# Altium PCB Motor_Driver_HIP4082_Board_V1.0.PcbDoc
Units mm, origin at the board's own origin, x right, y up, seen from the top; angles counter-clockwise.
Board outline 78 x 40 mm, 4 copper layers (TOP, GND02, POWER03, Bottom), stack 0.603 mm thick; 59 components, 43 nets, 179 pads, 191 vias.
Unrouted connection lines stored in the file: 1.
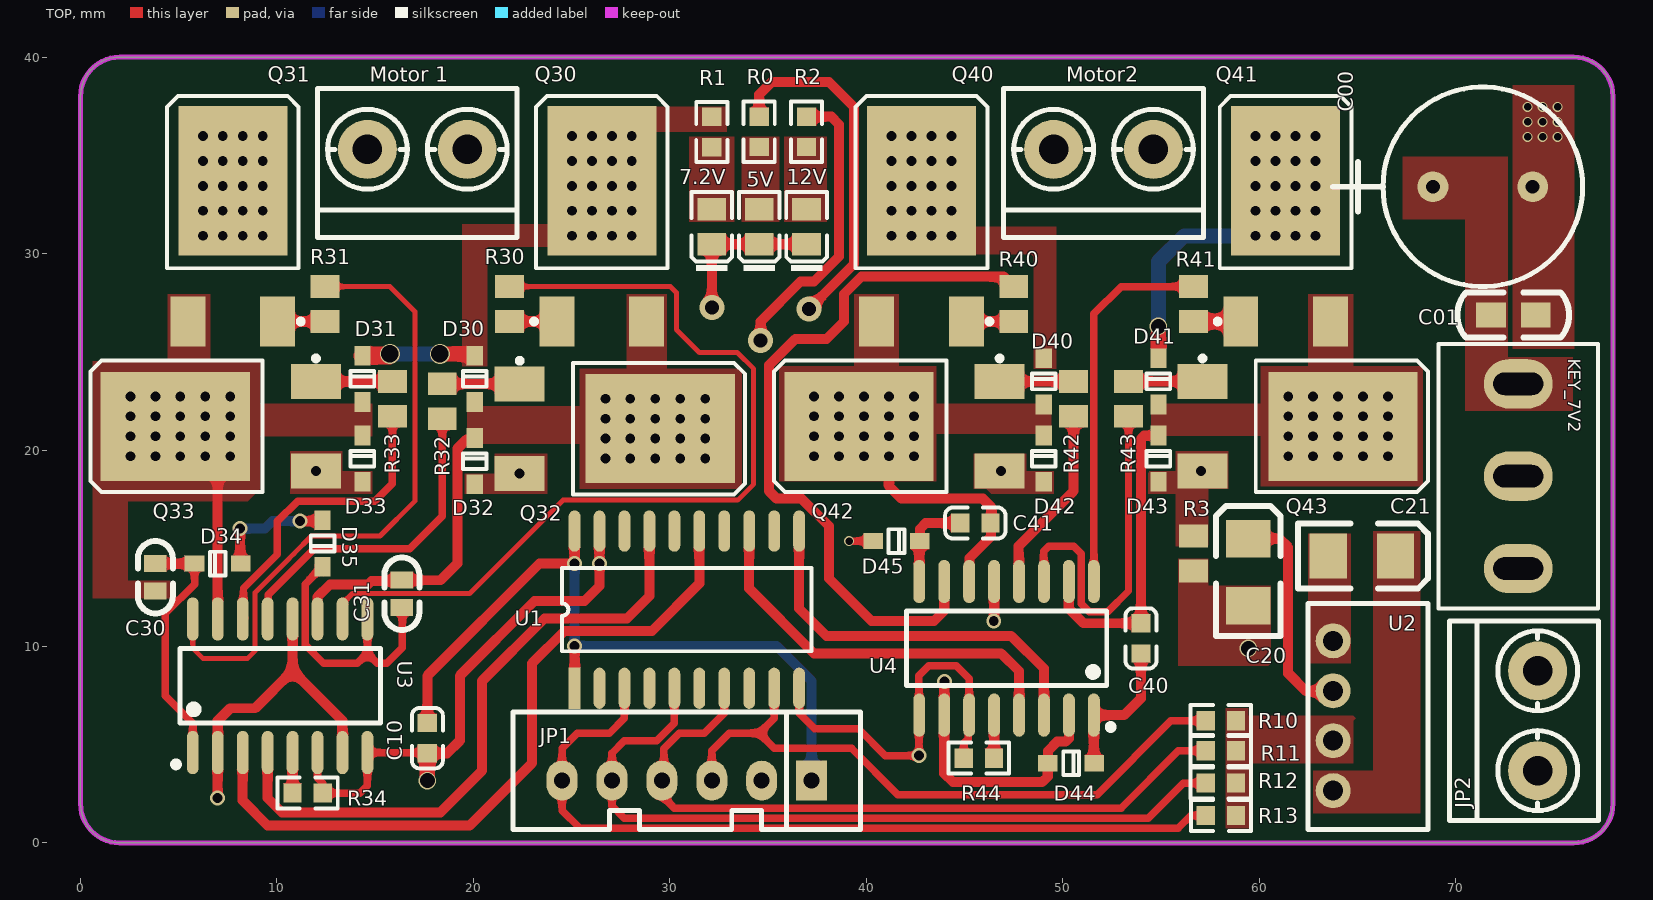
[diagram p0: TOP view]
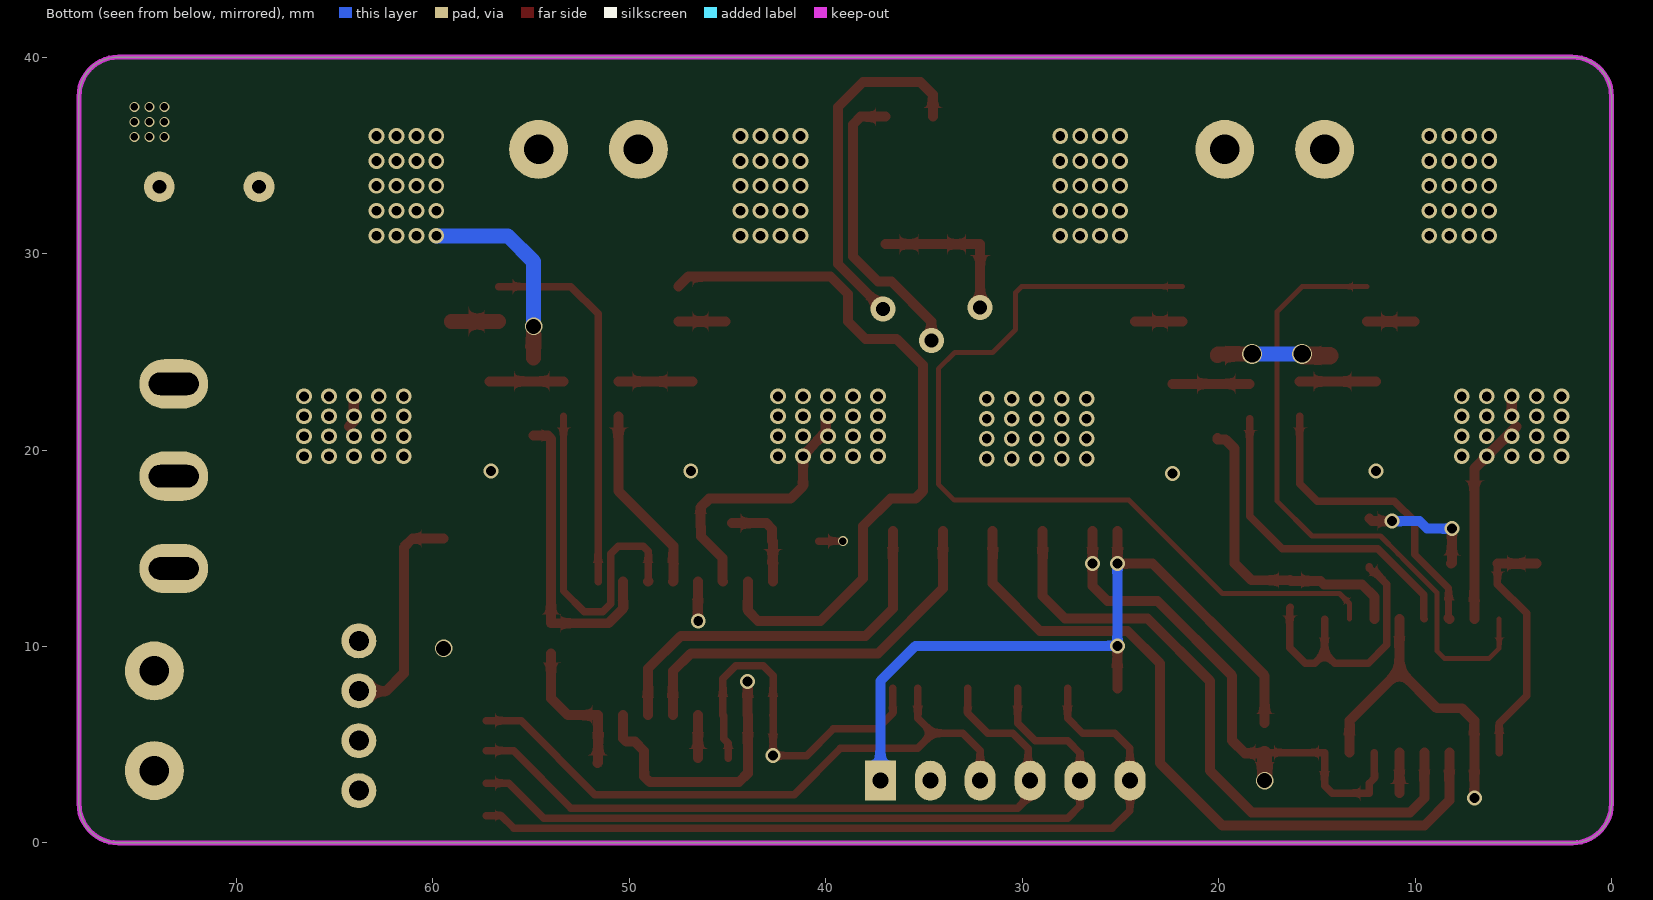
[diagram p1: Bottom view, seen from below]
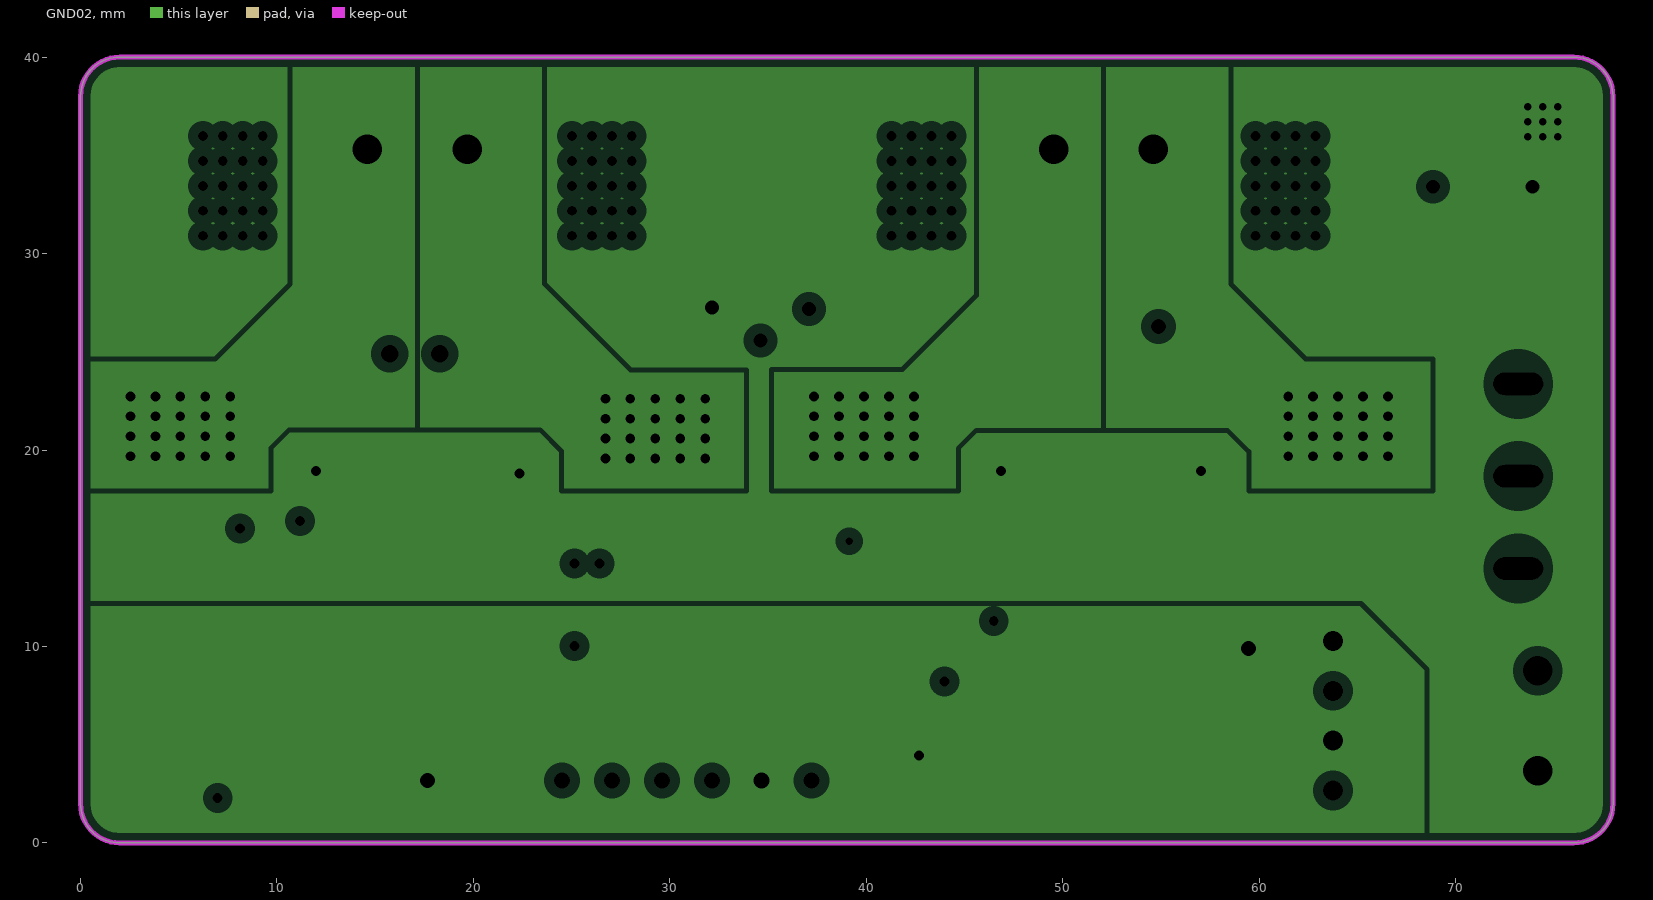
[diagram p2: GND02, clearances drawn from the general rule]
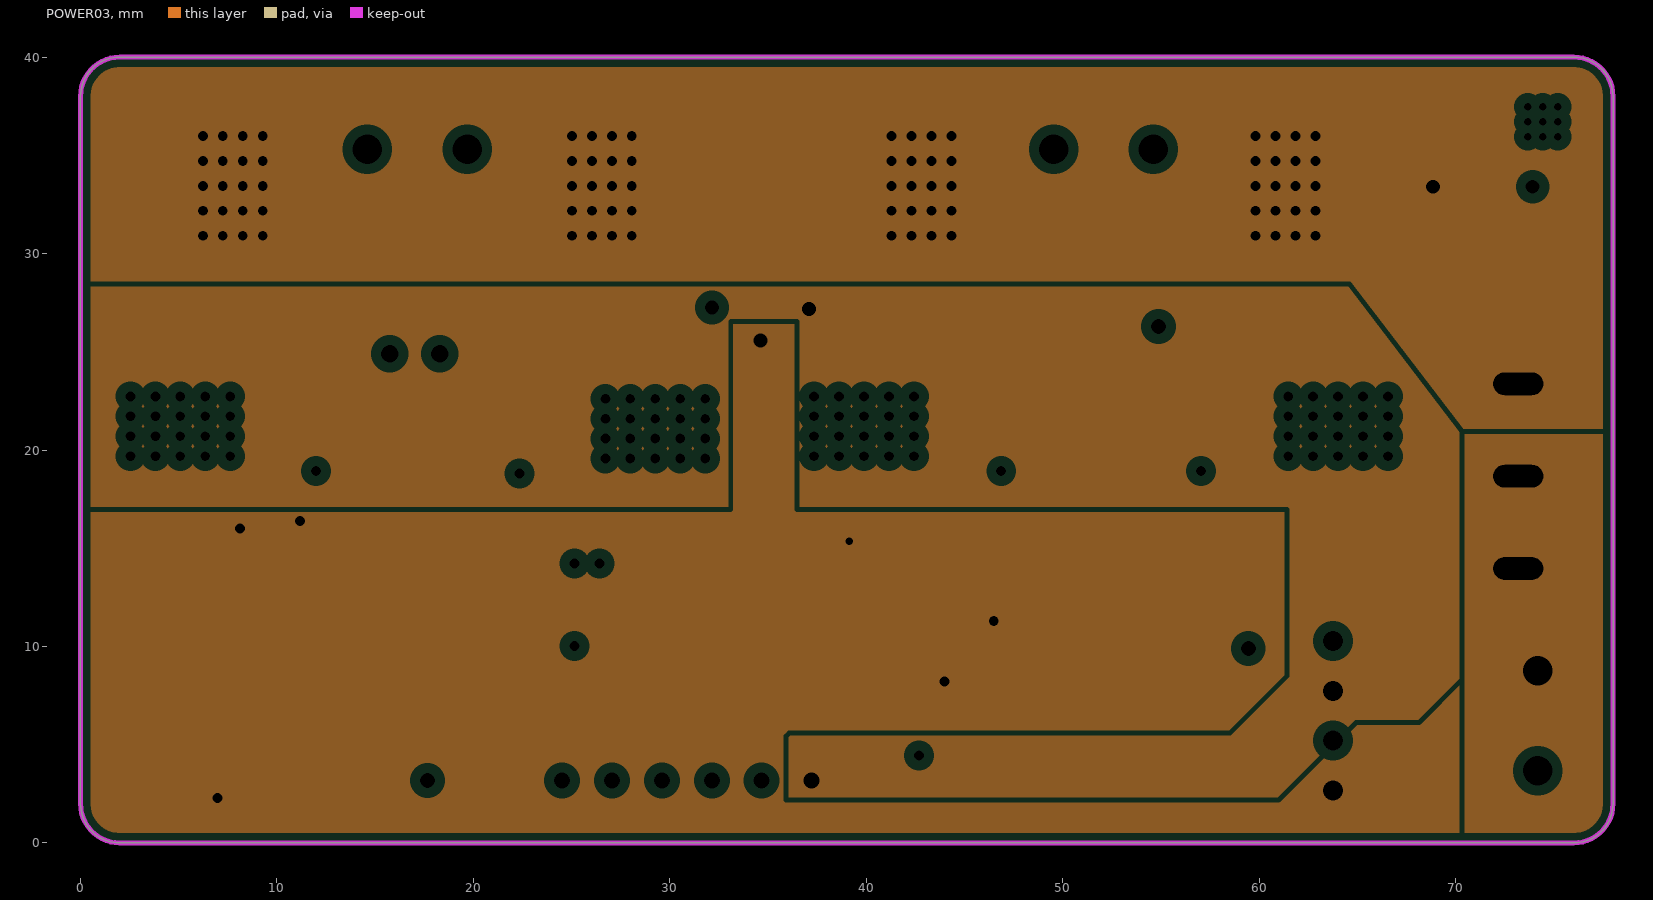
[diagram p3: POWER03, clearances drawn from the general rule]
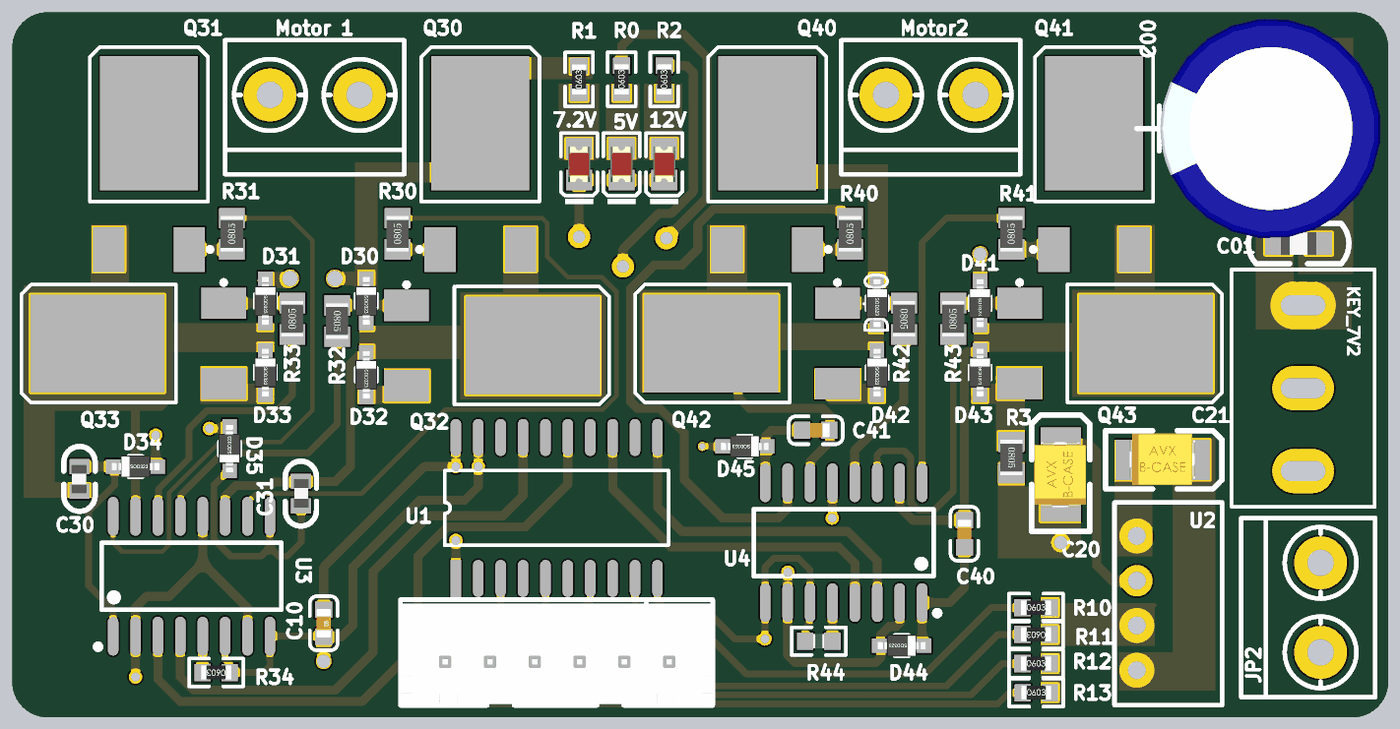
[diagram p4: 3D render of the assembled board from above, using the file's embedded part models]

## Layer stack, top to bottom
Top Solder: solder mask 0.0102, Solder Resist, Dk 3.5
TOP: signal copper 0.0356
Dielectric 2: prepreg 0.0711, PP-006, Dk 4.1
GND02: plane copper 0.035, net (Multiple Nets)
Dielectric 1: dielectric 0.32, FR-4, Dk 4.8
POWER03: plane copper 0.035, net (Multiple Nets)
Dielectric 3: prepreg 0.0711, PP-006, Dk 4.1
Bottom: signal copper 0.0356
Bottom Solder: solder mask 0.0102, Solder Resist, Dk 3.5

## Board outline
2,0 cw(c2,2) 0,2 0,38 cw(c2,38) 2,40 76,40 cw(c76,38) 78,38 78,2 cw(c76,2) 76,0

## Design rules (kind name [scope] priority, off if disabled: settings)
Clearance [All] p1: gap=0.051 ignorepadtopadclearanceinfootprint=FALSE
HoleSize [All] p1 off: absolutevalues=TRUE maxlimit=2.54 minlimit=0.025 maxpercent=80.000 minpercent=20.000
HoleToHoleClearance [All] p1 off: gap=0.254 allowstackedmicrovias=TRUE
MinimumSolderMaskSliver [All] p1 off: minsoldermaskwidth=0.254
PlaneClearance [All] p1: clearance=0.508
PlaneConnect [All] p1: planeconnectstyle=Direct reliefexpansion=0.508 reliefentries=4 reliefconductorwidth=0.254 reliefairgap=0.254
PolygonConnect [All] p1: connectstyle=Direct reliefconductorwidth=0.254 reliefentries=4 polygonreliefangle="90 Angle" airgapwidth=0.254
RoutingVias [All] p1: holewidth=0.711 width=1.27 viastyle="Through Hole" minholewidth=0.711 minwidth=1.27 maxholewidth=0.711 maxwidth=1.27
SilkToSilkClearance [All] p1 off: silktosilkclearance=0.254
SilkToSolderMaskClearance [IsPad] p1 off: minsilkscreentomaskgap=0.254 clearancetoexposedcopper=TRUE
SolderMaskExpansion [All] p1: expansion=0.102
Width PGND [InNet('PGND')] p1: maxlimit=1.27 minlimit=0.254 preferedwidth=0.762
Width GND [InNet('GND')] p2: maxlimit=1.27 minlimit=0.254 preferedwidth=0.762
Width 12V [InNet('12V')] p3: maxlimit=1.27 minlimit=0.254 preferedwidth=0.762
Width "7.2V In" [InNet('7.2V In')] p4: maxlimit=1.27 minlimit=0.254 preferedwidth=0.762
Width 7.2V [InNet('7.2V')] p5: maxlimit=1.27 minlimit=0.254 preferedwidth=0.762
Width 5V [InNet('5V')] p6: maxlimit=1.27 minlimit=0.254 preferedwidth=0.762
Width [All] p7: maxlimit=0.762 minlimit=0.254 preferedwidth=0.508
23 further rules are at their usual default settings.

## Classes and differential pairs
component class Motor_Driver_HIP4082_Board_V1.0: 5V 7.2V 12V C00 C01 C10 C20 C21 C30 C31 C40 C41 D30 D31 D32 D33 D34 D35 D40 D41 D42 D43 D44 D45 JP1 JP2 Motor2 "Motor 1" Q31 Q32 Q40 Q41 Q42 Q43 R0 R1 R2 R3 R10 R11 R12 R13 R30 R31 R32 R33 R34 R40 R41 R42 R43 R44 U1 U2 U3 U4

## Components (designator, comment, footprint, x,y, rotation, side; value= is the part's Value field where it differs from the comment)
5V "" 0805_LED_S1 34.544,31.369 r90 top
7.2V "" 0805_LED_S1 32.131,31.369 r90 top
12V "" 0805_LED_S1 36.957,31.369 r90 top
C00 "470uF/25V" RB.2/.4 68.834,33.401 r180 top
C01 "100nF" 0805C 74.066,26.873 r180 top
C10 "100nF" 0603_C 17.653,5.334 r270 top
C20 "" 3528 59.436,15.494 r90 top value=4.7uF
C21 "" 3528 66.929,14.605 r0 top value=2.2uF
C30 "1uF" 0603C 3.81,14.224 r270 top
C31 "1uF" 0603C 16.358,11.989 r90 top
C40 "1uF" 0603_C 53.975,10.414 r90 top
C41 "1uF" 0603_C 45.542,16.281 r0 top
D30 "1N5819" SOD-323 20.066,23.622 r270 top
D31 "1N5819" SOD-323 14.351,23.622 r270 top
D32 "1N5819" SOD-323 20.066,19.431 r270 top
D33 "1N5819" SOD-323 14.351,19.558 r270 top
D34 "1N5819" SOD-323 6.985,14.224 r0 top
D35 "1N5819" SOD-323 12.319,15.24 r90 top
D40 "1N5819" SOD-323 49.022,23.495 r270 top
D41 "1N5819" SOD-323 54.864,23.495 r270 top
D42 "1N5819" SOD-323 49.022,19.558 r270 top
D43 "1N5819" SOD-323 54.864,19.558 r270 top
D44 "1N5819" SOD-323 50.419,4.064 r180 top
D45 "1N5819" SOD-323 41.529,15.367 r180 top
JP1 "HEADER 6" SIP6N 37.211,3.175 r180 top
JP2 "HEADER 2" KF301-2P#1 74.168,6.223 r180 top
KEY_7V2 "SS-12F23" KEY_7V2 73.177,18.67 r270 top
Motor2 "HEADER 2" KF301-2P#1 52.07,35.306 r270 top
"Motor 1" "HEADER 2" KF301-2P#2 17.145,35.306 r270 top
Q30 "IR7843" LR7843#1 26.537,30.143 r270 top
Q31 "IR7843" LR7843#2 7.753,30.143 r270 top
Q32 "IR7843" LR7843#1 25.952,21.088 r180 top
Q33 "IR7843" LR7843#2 8.382,21.209 r0 top
Q40 "IR7843" LR7843#2 42.805,30.143 r270 top
Q41 "IR7843" LR7843#1 61.335,30.143 r270 top
Q42 "IR7843" LR7843#2 43.18,21.209 r0 top
Q43 "IR7843" LR7843#1 60.706,21.209 r180 top
R0 "4.7K" 0603_R 34.544,36.195 r90 top
R1 "4.7K" 0603_R 32.131,36.187 r90 top
R2 "4.7K" 0603_R 36.957,36.195 r90 top
R3 "0" 0805 56.642,14.731 r270 top
R10 "10K" 0603_R 58.039,6.223 r0 top
R11 "10K" 0603_R 58.039,4.699 r180 top
R12 "10K" 0603_R 58.039,3.048 r0 top
R13 "10K" 0603_R 58.047,1.397 r0 top
R30 "20" 0805 21.844,27.432 r90 top
R31 "20" 0805 12.446,27.432 r90 top
R32 "20" 0805 18.415,22.479 r270 top
R33 "20" 0805 15.875,22.606 r90 top
R34 "10K" 0603_R 11.557,2.54 r180 top
R40 "20" 0805 47.498,27.432 r90 top
R41 "20" 0805 56.642,27.432 r90 top
R42 "20" 0805 50.546,22.606 r270 top
R43 "20" 0805 53.34,22.606 r90 top
R44 "10K" 0603_R 45.72,4.318 r0 top
U1 "74HC245" SOP20 25.146,7.875 r90 top
U2 "B0512S-1W" SIP4_B_S-1W 62.484,0.686 r0 top
U3 "HIP4082" SOP-16_208mil#1 10.16,8.001 r0 top
U4 "HIP4082" SOP-16_208mil#2 47.133,9.906 r180 top

## Footprints (in the part's own frame and the unit in brackets; to place one, negate y for a bottom-side part, rotate by r counter-clockwise, add the part's x,y. Pads: shape width x height; smd on the part's side, far side on the other; paste and mask are expansions set on the pad)
0603_C [mm]
  rect 0.93x0.98 smd: 1(-0.77,0) 2(0.77,0)
  silkscreen extent -1.53,-0.79 1.54,0.79, body extent -0.8,-0.4 0.8,0.4, height 0.3
0603_R [mm]
  rect 0.93x0.98 smd: 1(-0.77,0) 2(0.77,0)
  silkscreen extent -1.53,-0.79 1.54,0.79, body extent -0.85,-0.4 0.85,0.4, height 0.56
0603C [mil]
  rect 34x45 smd: 1(0,0) 2(55,0)
  silkscreen extent -45,-35 100,35, body extent -3,-18 60,16, height 37
0805 [mm]
  rect 1.16x1.47 smd: 1(-0.89,0) 2(0.89,0)
  body extent -1,-0.63 1,0.63, height 0.55
0805_LED_S1 [mm]
  rect 1.16x1.47 smd: A(0.89,0) K(-0.89,0)
  silkscreen extent -2.24,-1.04 1.77,1.03, body extent -1.01,-0.62 1.01,0.62, height 1.1
0805C [mil]
  rect 60x50 smd: 1(0,0) 2(90,0)
  silkscreen extent -67,-45 157,45, body extent 6,-26 84,26, height 29
3528 [mil]
  rect 75x90 smd: 1(0,0) 2(-135,0)
  silkscreen extent -195,-65 65,65, body extent -141,-57 5,59, height 80
KEY_7V2 [mil]
  oval 99x138 hole 45 slot 100 at 90 deg: 1(-185.04,0) 2(0,0) 3(185.04,0)
  silkscreen extent -265,-160 265,160
KF301-2P#1 [mm]
  round 3 hole 1.5: 1(0,2.54) 2(0,-2.54)
  silkscreen extent -3.1,-5.08 4.5,5.08
KF301-2P#2 [mm]
  round 3 hole 1.5: 1(0,-2.54) 2(0,2.54)
  silkscreen extent -3.1,-5.08 4.5,5.08
LR7843#1 [mm]
  rect 7.6x5.55 smd: 1(-3.556,0)
  rect 2.54x1.778 smd: 2(3.6,-2.28) 3(3.6,2.28)
  silkscreen extent -7.87,-3.58 3.72,3.35
LR7843#2 [mm]
  rect 7.6x5.55 smd: 1(-3.556,0)
  rect 2.54x1.778 smd: 2(3.6,2.28) 3(3.6,-2.28)
  silkscreen extent -7.87,-3.35 3.72,3.58
RB.2/.4 [mil]
  round 62 hole 28: 1(0,0) 2(-200,0)
  silkscreen extent -300,-200 200,200, body extent -345,-246 147,246, height 986
SIP4_B_S-1W [mil]
  round 70 hole 40: 1(50,378) 2(50,278) 3(50,178) 4(50,78)
  silkscreen extent 0,0 240,453
SIP6N [mil]
  rect 62x80 hole 32: 1(0,0)
  oval 62x80 hole 32: 2(100,0) 3(200,0) 4(300,0) 5(400,0) 6(500,0)
  silkscreen extent -98,-138 598,98, body extent -99,-129 597,95, height 277
SOD-323 [mm]
  rect 1x0.83 smd: 1(1.18,0) 2(-1.18,0)
  silkscreen extent -0.4,-0.6 0.4,0.6, body extent -1.35,-0.62 1.35,0.63, height 1.1
SOP20 [mm]
  rect 2.1x0.6 smd: 1(0,0)
  oval 2.1x0.6 smd: 2(0,-1.27) 3(0,-2.54) 4(0,-3.81) 5(0,-5.08) 6(0,-6.35) 7(0,-7.62) 8(0,-8.89) 9(0,-10.16) 10(0,-11.43) 11(8,-11.43) 12(8,-10.16) 13(8,-8.89) 14(8,-7.62) 15(8,-6.35) 16(8,-5.08) 17(8,-3.81) 18(8,-2.54) 19(8,-1.27) 20(8,0)
  silkscreen extent 1.89,-12.06 6.11,0.64
SOP-16_208mil#1 [mm]
  oval 0.6x2.2 smd: 1(-4.445,-3.4) 2(-3.175,-3.4) 3(-1.905,-3.4) 4(-0.635,-3.4) 5(0.635,-3.4) 6(1.905,-3.4) 7(3.175,-3.4) 8(4.445,-3.4) 9(4.445,3.4) 10(3.175,3.4) 11(1.905,3.4) 12(0.635,3.4) 13(-0.635,3.4) 14(-1.905,3.4) 15(-3.175,3.4) 16(-4.445,3.4)
  silkscreen extent -5.45,-4.15 5.1,1.9
SOP-16_208mil#2 [mm]
  oval 0.6x2.2 smd: 1(-4.445,3.4) 2(-3.175,3.4) 3(-1.905,3.4) 4(-0.635,3.4) 5(0.635,3.4) 6(1.905,3.4) 7(3.175,3.4) 8(4.445,3.4) 9(4.445,-3.4) 10(3.175,-3.4) 11(1.905,-3.4) 12(0.635,-3.4) 13(-0.635,-3.4) 14(-1.905,-3.4) 15(-3.175,-3.4) 16(-4.445,-3.4)
  silkscreen extent -5.45,-1.9 5.1,4.15

## Part data
5V 7.2V 12V: library part LED
C00: library part CAPACITOR, "Capacitor"
C01 C10 C30 C31 C40 C41: library part CAP, "Capacitor"
C20 C21: library part "Cap Pol3", "Polarized Capacitor (Surface Mount)", LatestRevisionDate=29-May-2009, LatestRevisionNote="IPC-7351 Footprint Added.", PackageDescription="Chip Capacitor", PackageReference=C0805, Published=8-Jun-2000, Publisher="Altium Limited"
D30 D31 D32 D33 D34 D35 D40 D41 D42 D43 D44 D45: library part "DIODE SCHOTTKY", "Schottky Diode"
KEY_7V2: library part SSW-1P, "1路波动开关", 学习资源=ww
Q30 Q31 Q32 Q33 Q40 Q41 Q42 Q43: library part MOSFET-N, "N-Channel MOSFET", LatestRevisionDate=17-Jul-2002, LatestRevisionNote="Re-released for DXP Platform.", PackageDescription="TO, Flat Index; 3 In-Line, Axial Leads; Body Dia. 4.6mm; Lead Dia. 0.5 mm (max)", PackageReference=E3, PackageVersion=1995/1996, Published=8-Jun-2000, Publisher="Altium Limited"
R0 R1 R2 R3 R10 R11 R12 R13 R30 R31 R32 R33 R34 R40 R41 R42 R43 R44: library part RES2
U2: library part "4 HEADER", "4 Pin Header"

## Via types
v1: diameter 0.8, hole 0.5, TOP to Bottom, 160 vias
v2: diameter 0.762, hole 0.508, TOP to Bottom, 13 vias
v3: diameter 0.508, hole 0.381, TOP to Bottom, 10 vias
v4: diameter 1.27, hole 0.711, TOP to Bottom, 3 vias
v5: diameter 0.889, hole 0.762, TOP to Bottom, 3 vias
v6: diameter 1.016, hole 0.889, TOP to Bottom, 2 vias

## Nets (pads, with @x,y where several pads share a name; then routed paths per layer and width w, separated by ;. In a path a pad name is that pad's centre, name@x,y a point inside that pad or via, vN(x,y) a via of type N, cw(c..) or ccw(c..) an arc to the next point about the centre after c; other vN are vias at no path point)
5V: C10.1 C20.1 JP1.1 R0.2 U1.1 U1.20 U2.2 | length 67.4
  TOP w0.508: C10.1 17.653,8.509 23.368,14.224 v2(25.146,14.224) U1.20 ; U1.1 v2(25.146,10.033) ; R0.2 34.544,38.1 35.179,38.735 38.1,38.735 39.37,37.465 39.37,29.464 v4(37.084,27.178) ; C20.1 61.022,15.494 61.468,15.048 61.468,8.636 62.381,7.723 63.73,7.723 U2.2
  Bottom w0.508: v2(25.146,14.224) v2(25.146,10.033) 35.433,10.033 37.211,8.255 JP1.1
7.2V: C00.1 C01.2 D30.2 D31.2 D40.2 D41.2 KEY_7V2.1 Q30.1 Q31.1 Q40.1 Q41.1 R1.2 | length 16.2
  TOP w0.762: v6(18.288,24.892) 20.032,24.892 20.064,24.86 20.064,24.801 20.066,24.799 D30.2 ; D41.2 v5(54.864,26.289)
  TOP w0.889: D31.2 v6@15.711,24.802
  Bottom w0.762: v6(15.748,24.892) v6(18.288,24.892) ; v5(54.864,26.289) 54.864,29.591 56.178,30.905 v1(59.811,30.905)
  other v1: 6.229,30.905 7.245,30.905 8.261,30.905 9.277,30.905 25.013,30.905 26.029,30.905 27.045,30.905 28.061,30.905 41.281,30.905 42.297,30.905 43.313,30.905 44.329,30.905 60.827,30.905 61.843,30.905 62.859,30.905 6.229,32.175 7.245,32.175 8.261,32.175 9.277,32.175 25.013,32.175 26.029,32.175 27.045,32.175 28.061,32.175 41.281,32.175 42.297,32.175 43.313,32.175 44.329,32.175 59.811,32.175 60.827,32.175 61.843,32.175 62.859,32.175 6.229,33.445 7.245,33.445 8.261,33.445 9.277,33.445 25.013,33.445 26.029,33.445 27.045,33.445 28.061,33.445 41.281,33.445 42.297,33.445 43.313,33.445 44.329,33.445 59.811,33.445 60.827,33.445 61.843,33.445 62.859,33.445 6.229,34.715 7.245,34.715 8.261,34.715 9.277,34.715 25.013,34.715 26.029,34.715 27.045,34.715 28.061,34.715 41.281,34.715 42.297,34.715 43.313,34.715 44.329,34.715 59.811,34.715 60.827,34.715 61.843,34.715 62.859,34.715 6.229,35.985 7.245,35.985 8.261,35.985 9.277,35.985 25.013,35.985 26.029,35.985 27.045,35.985 28.061,35.985 41.281,35.985 42.297,35.985 43.313,35.985 44.329,35.985 59.811,35.985 60.827,35.985 61.843,35.985 62.859,35.985
"7.2V In": JP2.2 KEY_7V2.2 KEY_7V2.3
12V: C21.1 D34.1 D35.1 D44.1 D45.1 R2.2 U2.4 U3.2 U3.7 U3.12 U4.2 U4.7 U4.12 | length 55
  TOP w0.381: v3(39.116,15.367) D45.1
  TOP w0.508: v2(6.985,2.286) U3.2 6.985,6.223 7.62,6.858 8.89,6.858 10.795,8.763 ; v2(8.128,16.002) 8.128,14.261 D34.1 ; U3.12 10.795,8.763 ; v2(11.176,16.383) 12.192,16.383 D35.1@12.319,16.51 ; U3.7 13.335,6.223 10.795,8.763 ; v4(34.62,25.578) 34.62,26.543 36.652,28.575 37.338,28.575 38.608,29.845 38.608,36.576 38.219,36.965 R2.2 ; v2(43.967,8.23) 43.967,6.515 U4.7 43.958,3.547 44.406,3.099 48.946,3.099 49.239,3.392 D44.1 49.239,4.687 49.708,5.156 50.14,5.156 50.308,5.325 U4.2 ; v2(46.482,11.303) 46.498,11.319 U4.12
  Bottom w0.508: v2(8.128,16.002) 9.398,16.002 9.779,16.383 v2(11.176,16.383)
AHO1: R30.2 U3.10 | length 45.4
  TOP w0.254: U3.10 13.335,12.192 13.843,12.7 19.812,12.7 24.562,17.45 33.452,17.45 34.265,18.263 34.265,24.13 33.426,24.968 31.496,24.968 30.328,26.137 30.328,28.016 30.022,28.322 R30.2
AHO2: R40.2 U4.10 | length 36.7
  TOP w0.508: U4.10 43.958,11.827 43.434,11.303 40.259,11.303 38.1,13.462 38.1,16.129 36.703,17.526 35.433,17.526 35.052,17.907 35.052,24.325 36.381,25.654 37.973,25.654 38.862,26.543 38.862,27.94 39.751,28.829 46.991,28.829 R40.2
AHS1: "Motor 1.2" C31.2 D30.1 D32.2 Q30.3 Q32.1 U3.11 | length 16
  TOP w0.508: U3.11 12.065,12.529 12.693,13.157 14.63,13.157 14.808,13.335 16.307,13.335 C31.2 16.37,13.373 18.326,13.373 19.177,14.224 19.177,20.067 19.636,20.526 20.066,20.526 D32.2
  other v1: 26.714,19.564 27.984,19.564 29.254,19.564 30.524,19.564 31.794,19.564 26.714,20.58 27.984,20.58 29.254,20.58 30.524,20.58 31.794,20.58 26.714,21.596 27.984,21.596 29.254,21.596 30.524,21.596 31.794,21.596 26.714,22.612 27.984,22.612 29.254,22.612 30.524,22.612 31.794,22.612
AHS2: C41.2 D40.1 D42.2 Motor2.2 Q40.3 Q42.1 U4.11 | length 13.8
  TOP w0.508: Q42.1@40.005,21.59 40.005,20.955 40.075,20.877 41.107,19.726 v1(41.148,19.685) 41.148,18.161 41.783,17.526 45.923,17.526 46.363,17.086 46.363,16.104 46.338,16.078 46.338,15.604 45.246,14.512 45.246,13.324 U4.11
  other v1: 37.338,19.685 38.608,19.685 39.878,19.685 42.418,19.685 37.338,20.701 38.608,20.701 39.878,20.701 41.148,20.701 42.418,20.701 37.338,21.717 38.608,21.717 39.878,21.717 41.148,21.717 42.418,21.717 37.338,22.733 38.608,22.733 39.878,22.733 41.148,22.733 42.418,22.733
ALO1: R32.2 U3.13 | length 16.7
  TOP w0.381: U3.13 9.554,11.43 9.554,12.641 11.899,14.986 16.764,14.986 18.415,16.637 R32.2
ALO2: R42.2 U4.13 | length 9.6
  TOP w0.508: U4.13 47.752,13.322 47.752,15.113 50.546,17.907 R42.2
BHO1: R31.2 U3.16 | length 32.8
  TOP w0.254: U3.16 5.715,9.906 6.223,9.398 8.509,9.398 8.89,9.779 8.89,12.751 10.431,14.292 10.858,14.719 11.76,15.621 15.24,15.621 17.018,17.399 17.018,27.051 15.748,28.321 R31.2 R31.2
BHO2: R41.2 U4.16 | length 19.3
  TOP w0.381: U4.16 51.578,26.94 52.96,28.322 R41.2
BHS1: "Motor 1.1" C30.2 D31.1 D33.2 Q31.3 Q33.1 U3.15 | length 11.7
  TOP w0.508: Q33.1 v1(6.35,19.685) 6.985,19.05 U3.15 ; v1(5.08,21.717) v1(5.08,22.733)
  other v1: 2.54,19.685 3.81,19.685 5.08,19.685 7.62,19.685 2.54,20.701 3.81,20.701 5.08,20.701 6.35,20.701 7.62,20.701 2.54,21.717 3.81,21.717 6.35,21.717 7.62,21.717 2.54,22.733 3.81,22.733 6.35,22.733 7.62,22.733
BHS2: C40.2 D41.1 D43.2 Motor2.1 Q41.3 Q43.1 U4.15 | length 17.3
  TOP w0.508: U4.15 50.308,11.922 51.046,11.184 C40.2 53.975,20.574 54.139,20.738 D43.2 ; v1(64.008,22.733) v1(64.008,21.717) 64.008,21.463 Q43.1
  other v1: 61.468,19.685 62.738,19.685 64.008,19.685 65.278,19.685 66.548,19.685 61.468,20.701 62.738,20.701 64.008,20.701 65.278,20.701 66.548,20.701 61.468,21.717 62.738,21.717 65.278,21.717 66.548,21.717 61.468,22.733 62.738,22.733 65.278,22.733 66.548,22.733
BLO1: R33.1 U3.14 | length 15.8
  TOP w0.381: U3.14@8.297,11.443 8.297,12.962 10.019,14.684 10.019,16.369 11.049,17.399 14.986,17.399 15.875,18.288 R33.1
  TOP w0.508: U3.14 U3.14@8.297,11.443
BLO2: R43.1 U4.14 | length 18.2
  TOP w0.381: U4.14@49.022,13.322 49.022,14.859 49.276,15.113 50.546,15.113 50.927,14.732 50.927,12.167 51.333,11.76 52.273,11.76 53.34,12.827 R43.1
  TOP w0.508: U4.14@49.022,13.322 U4.14
GND: C10.2 C20.2 C21.2 JP1.2 R3.2 R10.2 R11.1 R12.2 R13.2 R34.1 R44.1 U1.10 U1.19 U2.1 U2.3 U3.6 U3.8 U4.6 U4.8 | length 47.3
  TOP w0.381: U3.6 12.065,3.302 12.319,3.048 12.319,2.548 R34.1 14.224,2.54 14.605,2.921 U3.8 17.616,4.601 C10.2 ; U1.10 36.576,6.604 37.363,5.817 39.599,5.817 40.97,4.445 v2(42.672,4.445) U4.8@42.672,6.49 ; U4.8 U4.8@42.672,6.49 ; R44.1 44.958,4.326 44.958,5.08 45.186,5.308 45.186,6.464 U4.6 45.228,8.366 44.577,9.017 43.18,9.017 42.672,8.509 U4.8@42.672,6.49
  TOP w0.508: C10.2 18.661,4.564 19.304,5.207 19.304,8.509 23.114,12.319 25.654,12.319 26.416,13.081 v2(26.416,14.224) U1.19
  TOP w0.762: v5(17.653,3.175) C10.2
  other v5: 59.436,9.906
"Motor In1": U1.17 U3.4 | length 32.6
  TOP w0.508: U3.4 9.525,2.286 10.262,1.549 18.313,1.549 20.447,3.683 20.447,8.255 23.622,11.43 27.813,11.43 28.956,12.573 U1.17
"Motor In2": U1.15 U3.3 | length 37
  TOP w0.508: U3.3 8.255,2.159 9.525,0.889 19.812,0.889 22.987,4.064 22.987,9.144 24.638,10.795 29.083,10.795 31.496,13.208 U1.15
"Motor In3": U1.13 U4.4 | length 20.6
  TOP w0.508: U1.13 34.036,12.954 37.338,9.652 46.863,9.652 47.768,8.747 U4.4
"Motor In4": U1.11 U4.3 | length 20
  TOP w0.508: U1.11 36.576,11.938 37.973,10.541 47.371,10.541 49.038,8.874 U4.3
Net5V_A: 5V.A R0.1
Net7.2V_A: 7.2V.A R1.1
Net12V_A: 12V.A R2.1
NetC30_1: C30.1 D34.2 U3.1 | length 12.8
  TOP w0.381: U3.1 5.715,6.096 4.318,7.493 4.318,11.684 5.805,13.171 D34.2
  TOP w0.508: C30.1 D34.2
NetC31_1: C31.1 D35.2 U3.9 | length 14.3
  TOP w0.381: D35.2 12.319,13.975 12.094,13.75 12.009,13.75 11.43,13.171 11.43,10.084 12.37,9.144 14.097,9.144 14.605,9.652 ; U3.9 14.605,9.652 ; C31.1 16.383,11.963 16.383,9.931 15.596,9.144 15.113,9.144 14.605,9.652
NetC40_1: C40.1 D44.2 U4.1 | length 7.5
  TOP w0.508: D44.2 51.578,4.085 U4.1 53.115,6.506 53.975,7.366 C40.1
NetC41_1: C41.1 D45.2 U4.9 | length 4.8
  TOP w0.508: U4.9 D45.2@42.688,15.346 ; D45.2 42.723,15.381 42.723,15.984 43.02,16.281 C41.1
NetQ30_2: Q30.2 R30.1 | length 2.4
  TOP w0.508: R30.1 Q30.2 Q30.2
NetQ31_2: Q31.2 R31.1 | length 2.4
  TOP w0.508: Q31.2 R31.1 R31.1
NetQ32_2: Q32.2 R32.1 | length 3.9
  TOP w0.508: R32.1 Q32.2 Q32.2
NetQ33_2: Q33.2 R33.2 | length 3.9
  TOP w0.508: Q33.2 15.868,23.489 R33.2
NetQ40_2: Q40.2 R40.1 | length 2.4
  TOP w0.508: Q40.2 R40.1 R40.1
NetQ41_2: Q41.2 R41.1 | length 2.4
  TOP w0.508: Q41.2 Q41.2
  TOP w0.762: R41.1 Q41.2
NetQ42_2: Q42.2 R42.1 | length 3.8
  TOP w0.508: Q42.2 50.539,23.489 R42.1
NetQ43_2: Q43.2 R43.2 | length 3.8
  TOP w0.508: R43.2 57.099,23.496 Q43.2
NetR34_2: R34.2 U3.5 | length 2.1
  TOP w0.381: R34.2 R34.2@10.795,2.548
  TOP w0.508: R34.2@10.795,2.548 U3.5
NetR44_2: R44.2 U4.5 | length 2.2
  TOP w0.508: R44.2 46.498,4.326 U4.5
PGND: 5V.K 7.2V.K 12V.K C00.2 C01.1 D32.1 D33.1 D42.1 D43.1 JP2.1 Q32.3 Q33.3 Q42.3 Q43.3 R3.1 | length 8.3
  TOP w0.508: v4@32.131,27.051 7.2V.K 5V.K 12V.K
  other v2: 22.352,18.808 11.982,18.929 46.863,18.923 57.023,18.923
  other v3: 73.66,35.941 74.422,35.941 75.184,35.941 73.66,36.703 74.422,36.703 75.184,36.703 73.66,37.465 74.422,37.465 75.184,37.465
  other v4: 32.131,27.254
PWM1: JP1.6 R13.1 U1.3 | length 41.9
  TOP w0.381: U1.3 27.686,6.35 26.924,5.588 25.273,5.588 24.511,4.826 JP1.6 24.511,1.651 25.4,0.762 55.88,0.762 56.515,1.397 R13.1
PWM2: JP1.5 R12.1 U1.5 | length 39.5
  TOP w0.381: U1.5 30.226,6.096 29.337,5.207 27.686,5.207 27.051,4.572 JP1.5 27.051,1.905 27.686,1.27 54.356,1.27 56.134,3.048 R12.1
PWM3: JP1.4 R11.2 U1.7 | length 36.5
  TOP w0.381: JP1.4 29.591,2.413 30.226,1.778 52.959,1.778 55.88,4.699 56.007,4.699 R11.2 ; JP1.4@29.696,3.28 29.696,4.804 30.48,5.588 31.75,5.588 32.766,6.604 U1.7
PWM4: JP1.3 R10.1 U1.9 | length 32.5
  TOP w0.381: JP1.3 32.131,4.699 33.02,5.588 34.544,5.588 ; U1.9 35.306,6.35 34.544,5.588 ; R10.1 55.499,6.223 51.74,2.464 41.605,2.464 39.243,4.826 35.306,4.826 34.544,5.588
pads on no net: U1.2 U1.4 U1.6 U1.8 U1.12 U1.14 U1.16 U1.18

## Polygon pours and split planes (outlines as drawn)
GND on TOP "Top Layer-No Net" (solid, remove dead copper, pour order 68): 62.484,15.748 64.643,15.748 64.643,9.144 62.484,9.144
GND on TOP "Top Layer-No Net" (solid, remove dead copper, pour order 66): 58.293,6.858 58.293,0.762 59.563,0.762 59.563,4.064 64.77,4.064 64.77,6.223 64.897,6.35 64.77,6.477 59.436,6.477 59.436,6.858
GND on TOP "Top Layer-No Net" (solid, remove dead copper, pour order 64): 55.88,14.478 57.404,14.478 57.404,13.081 60.579,13.081 60.579,9.144 60.452,9.017 55.88,9.017
PGND on TOP "Top Layer-No Net" (solid, remove dead copper, pour order 62): 19.558,18.796 21.082,18.796 21.082,19.812 23.749,19.812 23.749,17.78 19.558,17.78
PGND on TOP "Top Layer-No Net" (solid, remove dead copper, pour order 60): 10.668,19.939 13.335,19.939 13.335,18.923 14.859,18.923 14.859,17.78 10.668,17.78
7.2V on TOP "Top Layer-No Net" (solid, remove dead copper, pour order 58): 19.431,24.257 20.701,24.257 20.701,30.353 25.527,30.353 25.527,31.496 19.431,31.496
AHS1 on TOP "Top Layer-No Net" (solid, remove dead copper, pour order 10): 33.655,18.034 33.655,24.13 29.845,24.13 29.845,27.94 27.813,27.94 27.813,24.13 25.4,24.13 25.4,22.225 19.685,22.225 19.685,20.32 25.4,20.32 25.4,18.034
PGND on TOP "Top Layer-No Net" (solid, remove dead copper, pour order 56): 55.753,19.939 58.42,19.939 58.42,18.034 57.404,18.034 57.404,14.986 57.277,15.113 55.753,15.113 55.753,17.78 54.356,17.78 54.356,18.796 54.229,18.923 55.753,18.923
PGND on TOP "Top Layer-No Net" (solid, remove dead copper, pour order 52): 45.466,19.812 48.133,19.812 48.133,18.923 49.53,18.923 49.53,17.78 46.355,17.78 46.101,18.034 45.466,18.034
Net12V_A on TOP "Top Layer-No Net" (solid, remove dead copper, pour order 48): 35.814,35.941 37.973,35.941 37.973,31.623 35.814,31.623
no net on TOP "Top Layer-No Net" (solid, remove dead copper, pour order 46): 33.655,35.941
Net7.2V_A on TOP "Top Layer-No Net" (solid, remove dead copper, pour order 44): 30.988,35.941 33.274,35.941 33.274,31.623 30.988,31.623
Net5V_A on TOP "Top Layer-No Net" (solid, remove dead copper, pour order 42): 35.56,35.941 35.56,31.623 33.655,31.623 33.655,35.941
Net7.2V_A on TOP "Top Layer-No Net" (solid, remove dead copper, pour order 40): 31.369,35.941 32.893,35.941 32.893,31.623 31.369,31.623
7.2V on TOP "Top Layer-No Net" (solid, remove dead copper, pour order 38): 29.21,37.465 32.893,37.465 32.893,36.195 29.21,36.195
no net on TOP "Top Layer-No Net" (solid, remove dead copper, pour order 30): 28.575,33.401
7.2V on TOP "Top Layer-No Net" (solid, remove dead copper, pour order 24): 43.815,31.369 49.657,31.369 49.657,24.13 48.514,24.13 48.514,29.845 48.387,29.972 43.815,29.972
AHS2 on TOP "Top Layer-No Net" (solid, remove dead copper, pour order 22): 35.56,24.13 35.687,24.257 39.37,24.257 39.37,27.94 41.656,27.94 41.656,24.257 43.561,24.257 43.561,22.352 49.403,22.352 49.403,20.701 49.276,20.828 43.561,20.828 43.561,18.415 35.56,18.415
no net on TOP "Top Layer-No Net" (solid, remove dead copper, pour order 20): 35.56,24.511
BHS2 on TOP "Top Layer-No Net" (solid, remove dead copper, pour order 18): 68.326,18.161 68.326,24.257 64.77,24.257 64.77,27.94 62.484,27.94 62.484,24.257 60.071,24.257 60.071,22.352 54.483,22.352 54.502,22.333 54.502,20.738 60.034,20.738 60.071,20.701 60.071,18.161
12V on TOP "Top Layer-No Net" (solid, remove dead copper, pour order 16): 62.738,3.683 62.738,1.524 68.199,1.524 68.199,15.875 65.786,15.875 65.786,3.683
7.2V on TOP "Top Layer-No Net" (solid, remove dead copper, pour order 14): 72.644,24.714 75.946,24.714 75.946,21.996 70.485,21.996 70.485,31.75 67.31,31.75 67.31,34.925 72.644,34.925
PGND on TOP "Top Layer-No Net" (solid, remove dead copper, pour order 12): 76.022,25.146 76.022,38.557 72.898,38.557 72.898,25.146
BHS1 on TOP "Top Layer-No Net" (solid, remove dead copper, pour order 8): 0.635,24.511 4.445,24.511 4.445,27.94 6.604,27.94 6.604,24.511 9.144,24.511 9.144,22.352 14.859,22.352 14.859,20.701 9.144,20.701 9.144,18.034 8.509,17.399 2.413,17.399 2.413,13.335 4.572,13.335 4.572,12.319 4.445,12.446 0.635,12.446
GND on GND02 (split plane): 68.4,8.786 68.4,0.51 2,0.51 1.985,0.509 1.833,0.518 1.668,0.546 1.507,0.592 1.353,0.656 1.206,0.737 1.07,0.834 0.945,0.945 0.834,1.07 0.737,1.206 0.656,1.353 0.592,1.507 0.546,1.668 0.518,1.833 0.509,1.985 0.51,2 0.51,12.063 65.123,12.063
no net on GND02 (split plane): 2,39.49 10.539,39.49 10.539,28.502 6.804,24.767 0.51,24.767 0.51,38 0.509,38.015 0.518,38.167 0.546,38.332 0.592,38.493 0.656,38.647 0.737,38.794 0.834,38.93 0.945,39.055 1.07,39.166 1.206,39.263 1.353,39.344 1.507,39.408 1.668,39.454 1.833,39.482 1.985,39.491
BHS1 on GND02 (split plane): 17.016,21.161 10.617,21.161 10.568,21.151 10.526,21.123 9.611,20.208 9.583,20.166 9.573,20.117 9.573,18.036 0.51,18.036 0.51,24.509 6.858,24.509 6.908,24.518 6.95,24.546 10.76,28.356 10.788,28.398 10.797,28.448 10.797,39.49 17.016,39.49
AHS1 on GND02 (split plane): 23.493,28.448 23.502,28.398 23.53,28.356 27.899,23.988 27.941,23.96 27.991,23.95 33.78,23.95 33.78,18.036 24.615,18.036 24.615,19.939 24.605,19.989 24.577,20.031 23.485,21.123 23.443,21.151 23.393,21.161 17.274,21.161 17.274,39.49 23.493,39.49
PGND on GND02 (split plane): 76.167,39.482 76.332,39.454 76.493,39.408 76.647,39.344 76.794,39.263 76.93,39.166 77.055,39.055 77.166,38.93 77.263,38.794 77.344,38.647 77.408,38.493 77.454,38.332 77.482,38.167 77.491,38.015 77.49,38 77.49,2 77.491,1.985 77.482,1.833 77.454,1.668 77.408,1.507 77.344,1.353 77.263,1.206 77.166,1.07 77.055,0.945 76.93,0.834 76.794,0.737 76.647,0.656 76.493,0.592 76.332,0.546 76.167,0.518 76.015,0.509 76,0.51 68.659,0.51 68.659,8.839 68.649,8.889 68.621,8.931 65.268,12.284 65.226,12.312 65.176,12.321 0.51,12.321 0.51,17.778 9.703,17.778 9.752,17.787 9.794,17.815 9.822,17.857 9.832,17.907 9.827,17.932 9.832,17.958 9.832,20.063 10.671,20.902 23.34,20.902 24.356,19.885 24.356,17.932 24.359,17.92 24.356,17.907 24.366,17.857 24.394,17.815 24.436,17.787 24.486,17.778 33.909,17.778 33.959,17.787 34.001,17.815 34.029,17.857 34.038,17.907 34.038,24.079 34.029,24.129 34.001,24.171 33.959,24.199 33.909,24.209 28.044,24.209 23.751,28.502 23.751,39.49 45.464,39.49 45.464,27.917 41.78,24.234 35.179,24.234 35.129,24.224 35.087,24.196 35.059,24.154 35.05,24.105 35.05,17.907 35.059,17.857 35.087,17.815 35.129,17.787 35.179,17.778 44.679,17.778 44.728,17.787 44.77,17.815 44.798,17.857 44.808,17.907 44.806,17.92 44.808,17.932 44.808,20.038 45.647,20.876 58.316,20.876 59.332,19.86 59.332,17.907 59.342,17.857 59.37,17.815 59.412,17.787 59.461,17.778 68.834,17.778 68.884,17.787 68.926,17.815 68.954,17.857 68.963,17.907 68.963,24.638 68.954,24.688 68.926,24.73 68.884,24.758 68.834,24.767 62.411,24.767 58.676,28.502 58.676,39.49 76,39.49 76.015,39.491
AHS2 on GND02 (split plane): 51.941,21.135 45.593,21.135 45.543,21.125 45.501,21.097 44.587,20.183 44.559,20.141 44.549,20.091 44.549,18.036 35.308,18.036 35.308,23.975 41.834,23.975 41.883,23.985 41.925,24.013 45.685,27.772 45.713,27.814 45.722,27.864 45.722,39.49 51.941,39.49
BHS2 on GND02 (split plane): 58.418,28.448 58.427,28.398 58.455,28.356 62.265,24.546 62.307,24.518 62.357,24.509 68.705,24.509 68.705,18.036 59.591,18.036 59.591,19.914 59.581,19.963 59.553,20.005 58.461,21.097 58.419,21.125 58.369,21.135 52.199,21.135 52.199,39.49 58.418,39.49
12V on POWER03 (split plane): 36.345,16.967 36.355,16.918 36.383,16.876 36.425,16.848 36.474,16.838 61.288,16.838 61.288,8.563 58.443,5.717 36.068,5.717 36.018,5.708 35.976,5.68 35.824,5.527 35.796,5.485 35.786,5.436 35.786,2.184 35.796,2.135 35.824,2.093 35.866,2.065 35.916,2.055 60.985,2.055 61.035,2.065 61.077,2.093 64.976,5.992 68.123,5.992 68.172,6.002 68.214,6.03 70.175,7.99 70.175,0.51 2,0.51 1.985,0.509 1.833,0.518 1.668,0.546 1.507,0.592 1.353,0.656 1.206,0.737 1.07,0.834 0.945,0.945 0.834,1.07 0.737,1.206 0.656,1.353 0.592,1.507 0.546,1.668 0.518,1.833 0.509,1.985 0.51,2 0.51,16.838 33.096,16.838 33.146,16.848 33.188,16.876 33.216,16.918 33.226,16.967 33.223,16.98 33.226,16.993 33.226,26.414 36.345,26.414
7.2V on POWER03 (split plane): 2,39.49 76,39.49 76.015,39.491 76.167,39.482 76.332,39.454 76.493,39.408 76.647,39.344 76.794,39.263 76.93,39.166 77.055,39.055 77.166,38.93 77.263,38.794 77.344,38.647 77.408,38.493 77.454,38.332 77.482,38.167 77.491,38.015 77.49,38 77.49,21.084 70.368,21.084 64.692,28.527 64.686,28.532 64.681,28.54 64.667,28.549 64.654,28.56 64.646,28.563 64.639,28.568 64.622,28.571 64.606,28.576 64.598,28.576 64.589,28.577 0.51,28.577 0.51,38 0.509,38.015 0.518,38.167 0.546,38.332 0.592,38.493 0.656,38.647 0.737,38.794 0.834,38.93 0.945,39.055 1.07,39.166 1.206,39.263 1.353,39.344 1.507,39.408 1.668,39.454 1.833,39.482 1.985,39.491
"7.2V In" on POWER03 (split plane): 77.49,2 77.491,1.985 77.482,1.833 77.454,1.668 77.408,1.507 77.344,1.353 77.263,1.206 77.166,1.07 77.055,0.945 76.93,0.834 76.794,0.737 76.647,0.656 76.493,0.592 76.332,0.546 76.167,0.518 76.015,0.509 76,0.51 70.434,0.51 70.434,8.291 70.437,8.306 70.434,8.321 70.434,20.826 77.49,20.826
5V on POWER03 (split plane): 70.175,20.911 70.175,8.356 68.069,6.251 64.922,6.251 64.873,6.241 64.831,6.213 60.932,2.314 36.045,2.314 36.045,5.382 36.122,5.459 58.496,5.459 58.546,5.468 58.588,5.496 61.509,8.417 61.537,8.459 61.547,8.509 61.547,16.967 61.537,17.017 61.509,17.059 61.467,17.087 61.417,17.097 36.604,17.097 36.604,26.543 36.594,26.593 36.566,26.635 36.524,26.663 36.474,26.672 33.096,26.672 33.047,26.663 33.005,26.635 32.977,26.593 32.967,26.543 32.967,17.097 0.51,17.097 0.51,28.319 64.525,28.319

## Keep-outs
Keep-Out Layer:
  the board outline again, w0.254

## Other copper
GND02 (plane layer: these items are gaps in the copper):
  lines w0.254: 0.051,12.192 65.176,12.192 68.529,8.839 68.529,-0.076 ; 0.254,24.638 0.254,17.907 9.703,17.907 ; 0.508,24.638 6.858,24.638 10.668,28.448 10.668,40 17.145,40 ; 9.703,17.958 9.703,20.117 10.617,21.031 17.12,21.031 23.393,21.031 24.486,19.939 24.486,17.932 ; 17.145,21.031 17.145,40 ; 23.622,40 17.145,40 ; 23.622,40.005 23.622,28.448 27.991,24.079 33.909,24.079 33.909,17.907 24.486,17.907 ; 44.679,17.907 35.179,17.907 35.179,24.105 41.834,24.105 45.593,27.864 45.593,40 52.07,40 ; 44.679,17.932 44.679,20.091 45.593,21.006 52.095,21.006 58.369,21.006 59.461,19.914 59.461,17.907 68.834,17.907 68.834,24.638 62.357,24.638 58.547,28.448 58.547,40.005 ; 52.07,21.006 52.07,40 ; 58.547,40 52.07,40
POWER03 (plane layer: these items are gaps in the copper):
  lines w0.254: -0.076,16.967 33.096,16.967 ; 0,28.448 64.589,28.448 70.304,20.955 ; 33.096,16.993 33.096,26.543 36.474,26.543 36.474,16.967 61.417,16.967 61.417,8.509 58.496,5.588 36.068,5.588 35.916,5.436 35.916,2.184 60.985,2.184 64.922,6.121 68.123,6.121 70.307,8.306 ; 70.304,-0.073 70.304,20.955 ; 77.978,20.955 70.304,20.955 ; 77.978,21.336 77.978,26.67

## Silkscreen, mask and mechanical layers (free items; w line width, h text height)
Mechanical 1:
  the board outline again, w0.254

## Dimensions
1.994,0 to 2,40 on Mechanical 1
0,1.994 to 78,2 on Mechanical 1